# EAGLE board Caricabatteria (EAGLE 9.5.2)
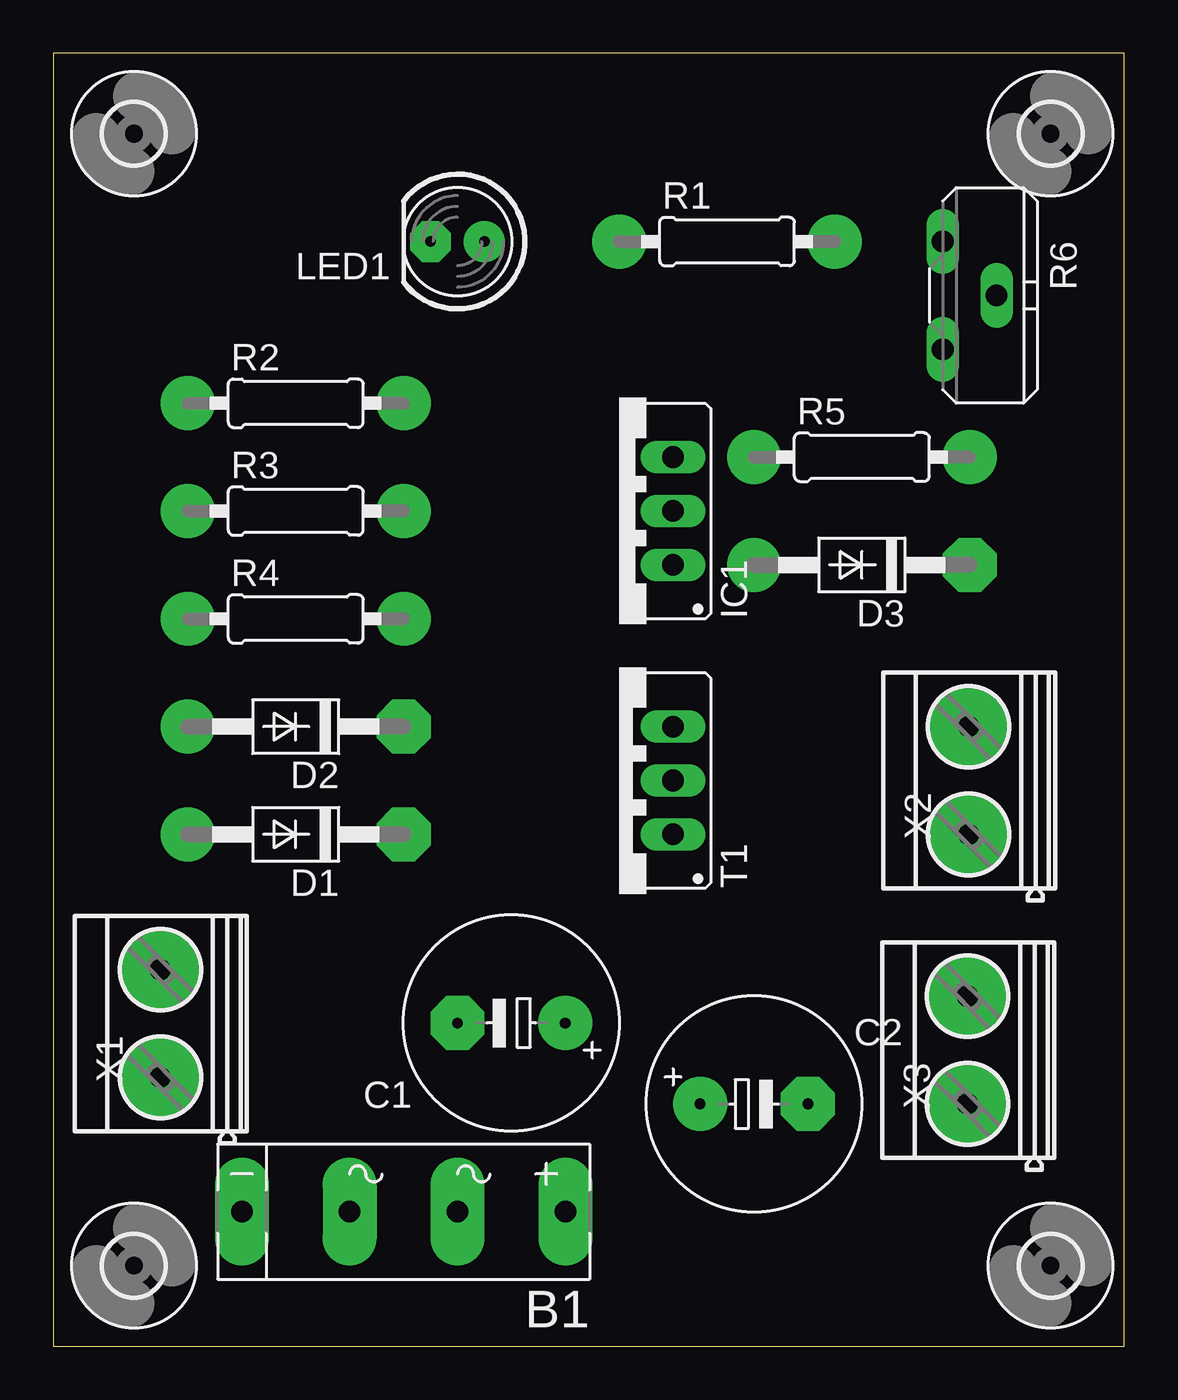
[diagram p0: board, top side]
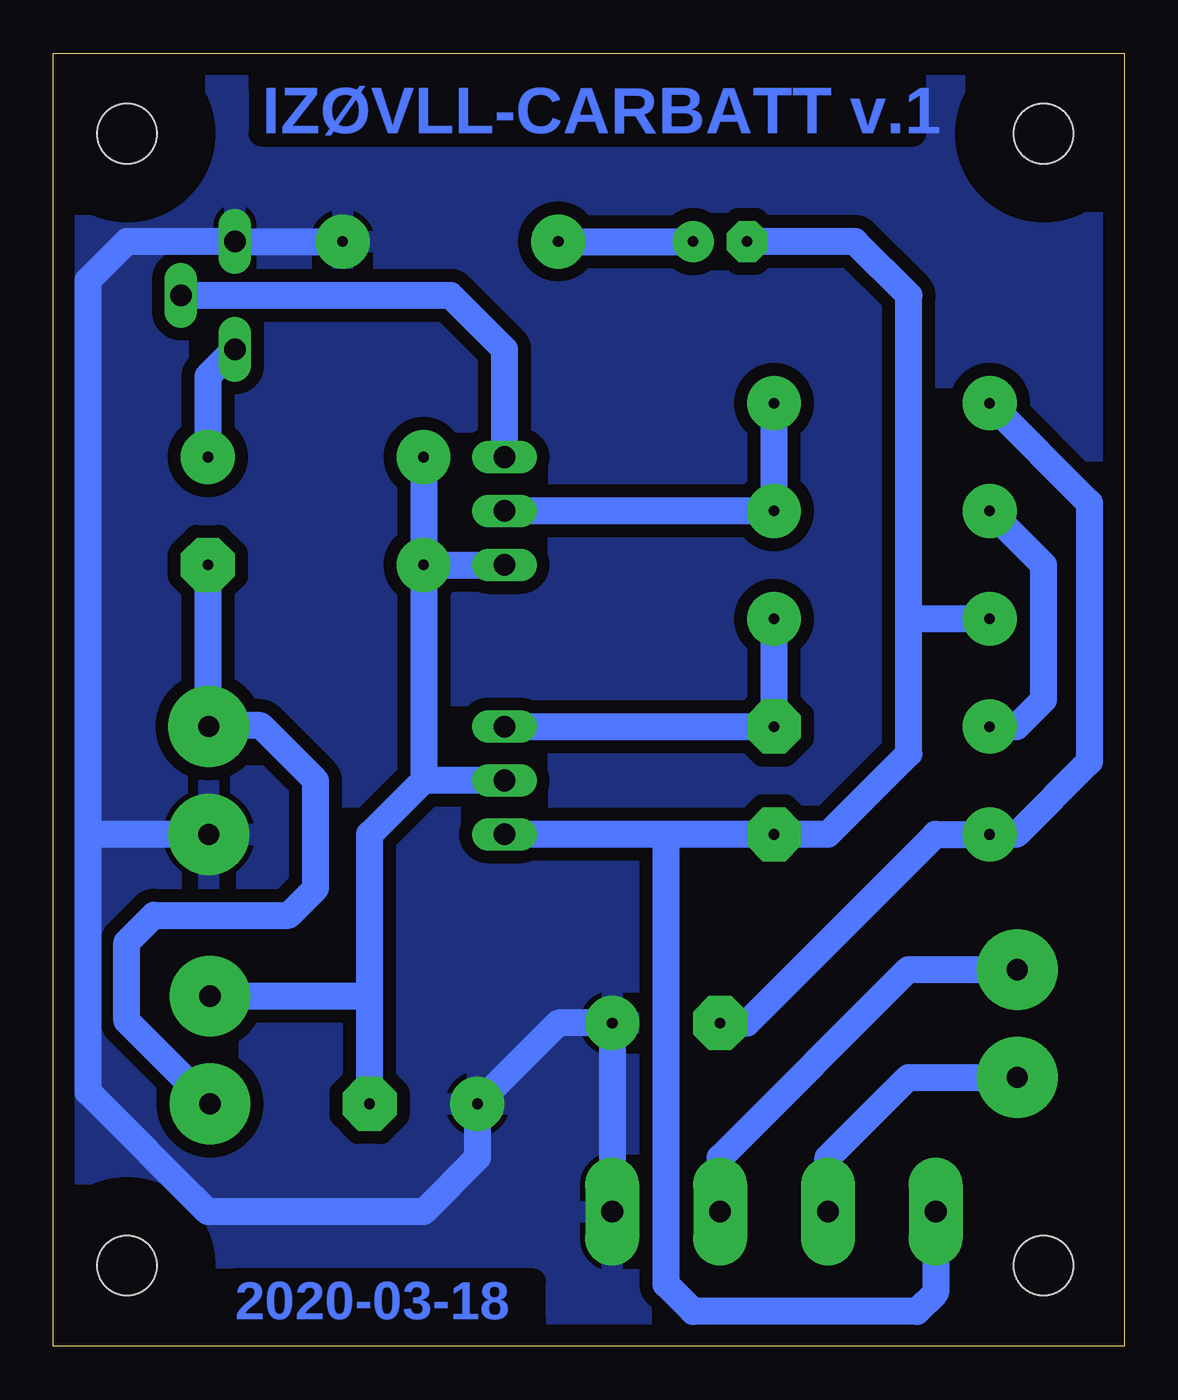
[diagram p1: board, bottom side, seen from below]

Size 50.47 x 60.95 mm. Coordinates in mm from the lower left corner, seen from the top.
Outline: 0,0 50.47,0 50.47,60.95 0,60.95 0,0
Copper layers (1*16): Top 0.035mm / dielectric 1.5mm / Bottom 0.035mm
Design rules "default": minimum track width 6mil, minimum drill 0.35mm, track to track 6mil, track to pad 6mil, pad to pad 6mil, via to via 6mil, smd to smd 6mil, copper to edge 40mil, drill to drill 6mil, minimum pad ring 10mil, minimum via ring 8mil, stop-mask expansion 4mil, vias tented up to drill 0mil, thermal gap 10mil

## Footprints (pad centres in the part's own frame; a part is rotated, then mirrored left to right if it is on the bottom)
SKB = drill 1.016 pad 2.54 long: + -7.62,0; - 7.62,0; AC1 -2.54,0; AC2 2.54,0
E5-10,5 = drill 0.5 pad 2.54: + -2.54,0 | drill 0.5 pad 2.54 octagon: - 2.54,0
DO41-10 = drill 0.5 pad 2.54: A 5.08,0 | drill 0.5 pad 2.54 octagon: C -5.08,0
79XXS = drill 1.016 long: GND -2.54,-2.54; IN 0,-2.54; OUT 2.54,-2.54
LED5MM = drill 0.5 pad 1.93: A -1.27,0 | drill 0.5 pad 1.93 octagon: K 1.27,0
0207/10 = drill 0.5 pad 2.54: 1 -5.08,0; 2 5.08,0
PT-10S = drill 1.016 long: A -2.54,-1.27; E 2.54,-1.27; S 0,1.27
TO220CS = drill 1.016 long: A 0,-2.54; C -2.54,-2.54; G 2.54,-2.54
2,8 = hole 2.8: 0,0
MKDSN1,5/2-5,08 = drill 1 pad 3.81: 1 -2.561,0.025; 2 2.519,0.025

## Placement (x,y rotation side)
B1  5A  [SKB]  16.51,6.35 180 top
C1  1000uF 25VL  [E5-10,5]  21.59,15.24 180 top
C2  2.2uF 25VL  [E5-10,5]  33.02,11.43 0 top
D1  1N4004  [DO41-10]  11.43,24.13 180 top
D2  1N4004  [DO41-10]  11.43,29.21 180 top
D3  1N4004  [DO41-10]  38.1,36.83 180 top
IC1  7912  [79XXS]  26.67,39.37 90 top
LED1  RED 5MM  [LED5MM]  19.05,52.07 180 top
R1  680  [0207/10]  31.75,52.07 0 top
R2  4,7  [0207/10]  11.43,44.45 0 top
R3  100  [0207/10]  11.43,39.37 0 top
R4  1K  [0207/10]  11.43,34.29 0 top
R5  1,5K  [0207/10]  38.1,41.91 0 top
R6  1K  [PT-10S]  43.18,49.53 270 top
T1  TAG 665-100  [TO220CS]  26.67,26.67 90 top
U$1  [2,8]  46.99,57.15 0 top
U$2  [2,8]  3.81,57.15 0 top
U$3  [2,8]  3.81,3.81 0 top
U$4  [2,8]  46.99,3.81 0 top
X1  MKDSN1,5/2-5,08  [MKDSN1,5/2-5,08]  5.08,15.24 90 top
X2  MKDSN1,5/2-5,08  [MKDSN1,5/2-5,08]  43.16,26.69 90 top
X3  MKDSN1,5/2-5,08  [MKDSN1,5/2-5,08]  43.1,13.99 90 top

## Library data of the parts
B1 = rectifier-IZ0VLL
C1 C2 = rcl-IZ0VLL; SPICEPREFIX: C
D1-D3 = diode-IZ0VLL
IC1 = v-reg
LED1 = led-IZ0VLL
R1-R5 = rcl-IZ0VLL; SPICEPREFIX: R
R6 = pot
T1 = triac
U$1-U$4 = holes
X1-X3 = con-phoenix-508-IZ0VLL

## Nets
N$1: C1.- D1.A R2.1
N$2: LED1.A R1.1
N$3: D3.C X2.2 X3.1
N$4: D2.A R3.1
N$5: D2.C R4.2 T1.G
N$6: IC1.IN R2.2 R3.2
N$7: B1.- D1.C LED1.K R4.1 T1.C
N$8: C2.- D3.A IC1.GND R5.1 T1.A X3.2
N$9: IC1.OUT R6.S
N$10: R5.2 R6.E
N$11: B1.+ C1.+ C2.+ R1.2 R6.A X2.1
N$12: B1.AC1 X1.2
N$13: B1.AC2 X1.1

## Tracks (layer width: path | path; a pad name or v marks a point on that pad's centre or on a via)
N$1
  Bottom 1.27: R2.1 1.65,39.75 1.65,27.56 5.08,24.13 D1.A 8.89,24.13 17.78,15.24 C1.-
N$2
  Bottom 1.27: R1.1 LED1.A
N$3
  Bottom 1.27: D3.C 43.18,29.26 | 43.18,29.26 X2.2 | X3.1 46.99,15.34 46.99,19.05 45.72,20.32 39.37,20.32 38.1,21.59 38.1,26.67 40.69,29.26 43.18,29.26
N$4
  Bottom 1.27: D2.A 5.08,29.21 3.81,30.48 3.81,36.83 R3.1
N$5
  Bottom 1.27: T1.G D2.C R4.2
N$6
  Bottom 1.27: R2.2 R3.2 IC1.IN
N$7
  Bottom 1.27: 21.59,24.13 D1.C 13.97,24.13 10.16,27.94 10.16,34.29 | 21.59,24.13 T1.C | R4.1 10.16,34.29 | B1.- 8.89,2.54 9.78,1.65 20.32,1.65 21.59,2.92 21.59,24.13 | 10.16,34.29 10.16,49.53 12.7,52.07 LED1.K
N$8
  Bottom 1.27: R5.1 D3.A | T1.A 33.02,26.67 | 33.02,26.67 35.56,24.13 35.56,16.51 | D3.A IC1.GND | D3.A 33.02,26.67 | C2.- 35.56,16.51 | X3.2 35.56,16.51
N$9
  Bottom 1.27: R6.S 31.75,49.53 29.21,46.99 IC1.OUT
N$10
  Bottom 1.27: R6.E 43.18,45.72 R5.2
N$11
  Bottom 1.27: R1.2 R6.A 46.99,52.07 48.82,50.24 48.82,24.13 | 48.82,24.13 48.82,11.99 43.18,6.35 33.02,6.35 30.48,8.89 C2.+ 26.67,15.24 C1.+ B1.+ | X2.1 48.82,24.13
  pour Bottom (isolate 0.61): -1.27,62.23 52.07,62.23 52.07,-1.27 -1.27,-1.27
N$12
  Bottom 1.27: B1.AC1 19.05,8.89 10.18,17.76 X1.2
N$13
  Bottom 1.27: B1.AC2 13.97,8.89 10.18,12.68 X1.1

## Text on the board
Bottom: IZØVLL-CARBATT v.1 | 2020-03-18